# Altium PCB 温控PCB_0617F.PcbDoc
Units mm, origin at the board's own origin, x right, y up, seen from the top; angles counter-clockwise.
Board outline 143.5 x 82 mm, 2 copper layers (Top Layer, Bottom Layer); 94 components, 82 nets, 366 pads, 493 vias.
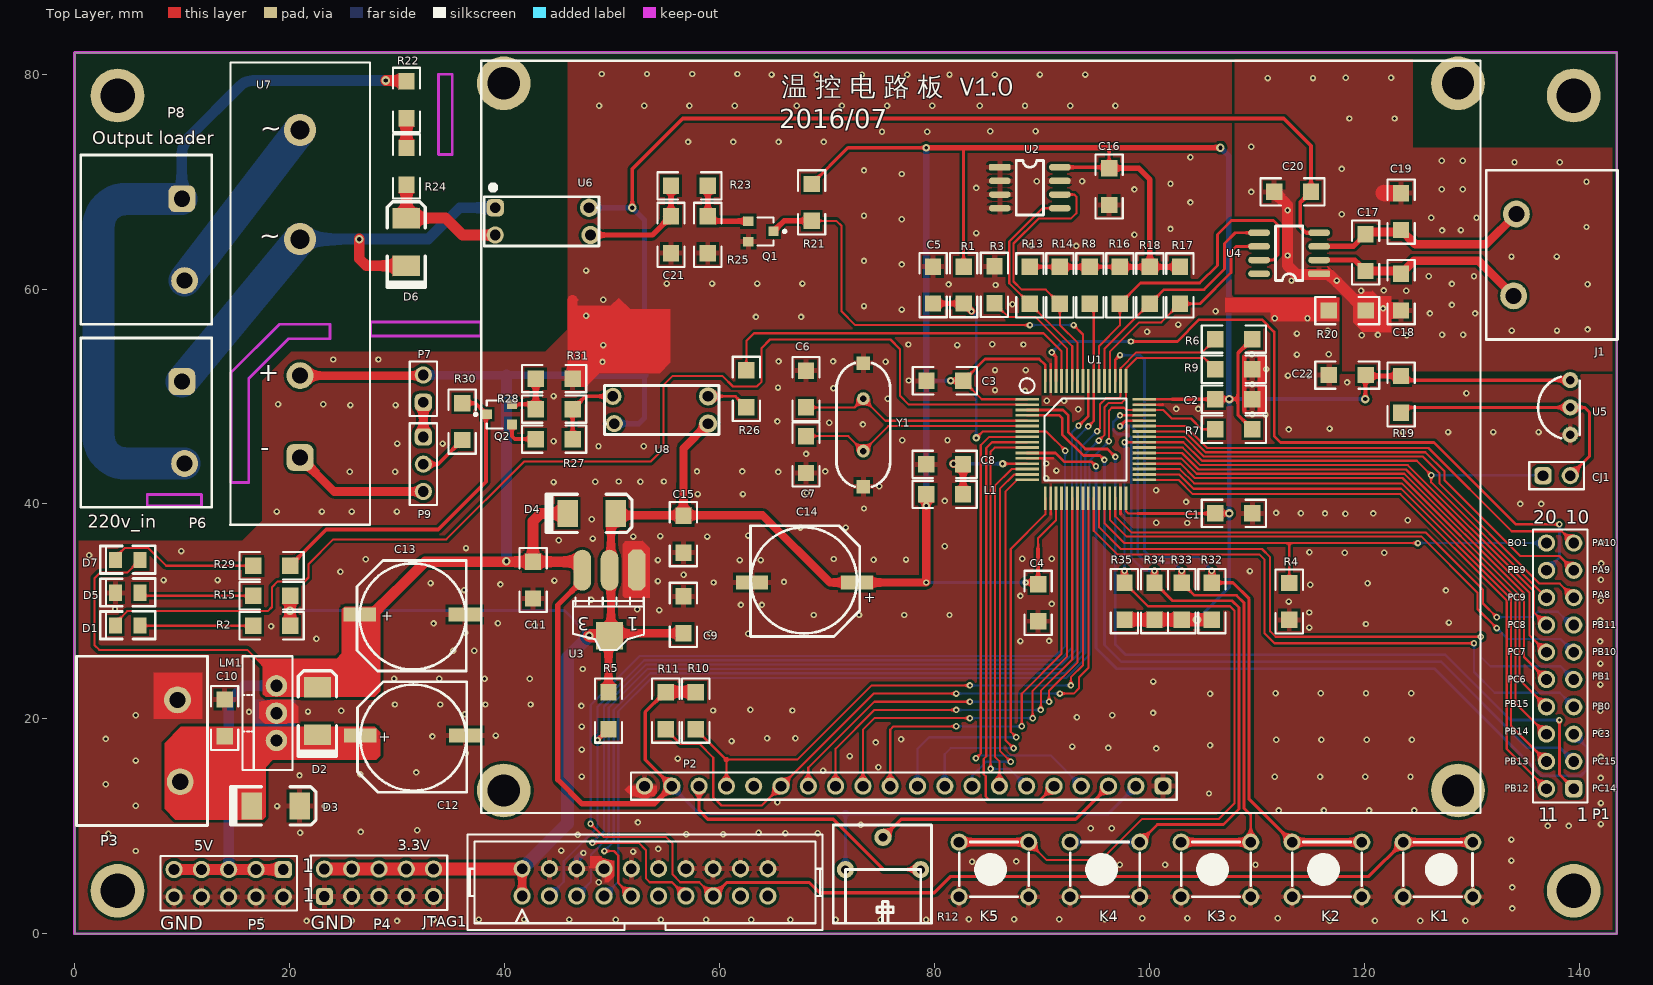
[diagram p0: Top Layer view]
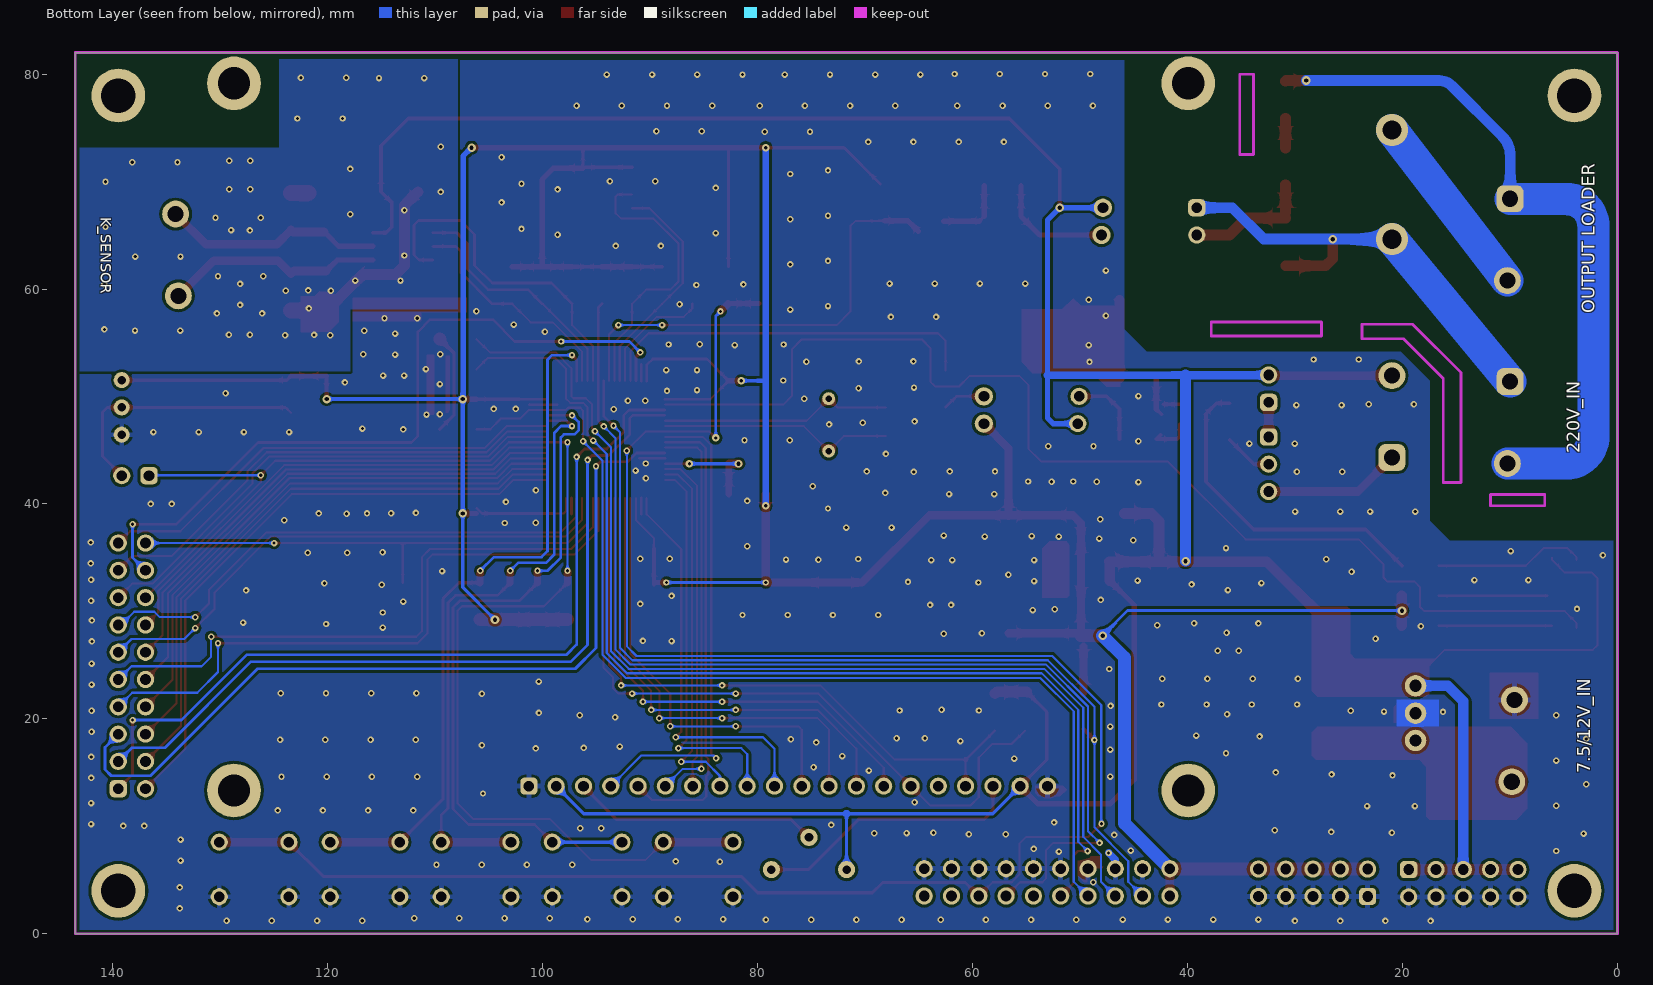
[diagram p1: Bottom Layer view, seen from below]

## Layer stack, top to bottom
Top Solder: solder mask 0.0102, Solder Resist, Dk 3.5
Top Layer: signal copper 0.0356
Dielectric1: dielectric 0.32, FR-4, Dk 4.8
Bottom Layer: signal copper 0.0356
Bottom Solder: solder mask 0.0102, Solder Resist, Dk 3.5

## Board outline
0,82 0,0 143.5,0 143.5,82

## Design rules (kind name [scope] priority, off if disabled: settings)
Clearance [All] p1: gap=0.2
ComponentClearance [All] p1: gap=0 collisioncheckmode=3 verticalgap=0 showdistances=FALSE
FabricationTestPointUsage TestPointUsage [All] p1: valid=0 allowmultiple=FALSE
FabricationTestpoint Testpoint [All] p1: side=3 testpointundercomponent=TRUE minsize=1.016 maxsize=2.54 preferedsize=1.524 minholesize=0 maxholesize=1.016 preferedholesize=0.813 testpointgrid=0.025 allowsidetop=TRUE allowsidebottom=TRUE usegrid=TRUE gridtolerance=0
PlaneConnect [All] p1: planeconnectstyle=Relief reliefexpansion=0.508 reliefentries=4 reliefconductorwidth=0.3 reliefairgap=0.254
PolygonConnect Via [All vs IsVia] p1: connectstyle=Direct reliefconductorwidth=0.254 reliefentries=2 polygonreliefangle="90 Angle" airgapwidth=0.254
PolygonConnect [All] p2: connectstyle=Relief reliefconductorwidth=0.508 reliefentries=4 polygonreliefangle="90 Angle" airgapwidth=0.254
RoutingVias [All] p1: holewidth=0.3 width=0.6 viastyle="Through Hole" minholewidth=0.254 minwidth=0.559 maxholewidth=0.711 maxwidth=1.27
SolderMaskExpansion [All] p1: expansion=0.102
Width [All] p1: maxlimit=3 minlimit=0.2 preferedwidth=0.2
26 further rules are at their usual default settings.

## Classes and differential pairs
component class MAX6675: C17 C18 C19 C20 CJ1 J1 R16 R17 R18 R19 R20 U4 U5
component class MCU: C1 C2 C3 C4 C5 C6 C7 C8 C9 D1 JTAG1 L1 P1 R1 R2 R3 R4 R5 R6 R7 R8 R9 U1 Y1
component class MCU电源: C10 C11 C12 C13 C14 C15 C16 D2 D3 D4 D5 LM1 P2 P3 P4 P5 R10 R11 R12 R13 R14 R15 U2 U3
component class 输出: C21 D6 D7 P6 P7 P8 P9 Q1 Q2 R21 R22 R23 R24 R25 R26 R27 R28 R29 R30 R31 R32 R33 R34 R35 U6 U7 U8

## Components (designator, comment, footprint, x,y, rotation, side; value= is the part's Value field where it differs from the comment)
C1 "104" 1206 106.162,39.116 r0 top
C2 "104" 1206 106.162,49.742 r0 top
C3 "104" 1206 82.702,51.46 r180 top
C4 "104" 1206 89.662,32.512 r270 top
C5 "104" 1206 79.883,58.649 r90 top
C6 "22p" 1206 68.062,48.98 r90 top
C7 "22p" 1206 68.062,42.884 r90 top
C8 "104" 1206 79.248,43.688 r0 top
C9 "104" 1206 56.657,27.965 r90 top
C10 "104" 1206 13.96,21.802 r270 top
C11 "104" 1206 42.662,31.2 r90 top
C12 "220UF" C220U 31.471,18.44 r180 top
C13 "470UF" C220U 31.42,29.718 r180 top
C14 "470UF" C220U 67.92,32.69 r0 top
C15 "104" 1206 56.657,35.467 r90 top
C16 "104" 1206 96.266,67.818 r90 top
C17 "104" 1206 120.132,61.68 r90 top
C18 "104" 1206 123.434,61.426 r270 top
C19 "104" 1206 123.434,65.49 r90 top
C20 "104" 1206 115.052,69.046 r180 top
C21 "104" 1206 55.499,66.76 r270 top
C22 "104" 1206 120.142,51.994 r180 top (schematic designator C3)
CJ1 "DS18B20" HDR1X2 136.642,42.63 r0 top
D1 "" LED 5.019,28.838 r0 top
D2 "1N4007" D7227 22.596,18.5 r90 top
D3 "1N4007" D7227 16.5,11.896 r0 top
D4 "1N4007" D7227 45.898,39.116 r0 top
D5 "" LED 5.019,31.886 r0 top
D6 "1N4007" D7227 30.861,62.154 r90 top
D7 "" LED 5.019,34.934 r0 top
J1 "K_SENSOR" OUT_CJ#1 137.15,62.442 r0 top
JTAG1 "JTAG" JTAG_20 53.076,4.784 r0 top
K1 "Comment" KEY_M 123.607,8.517 r0 top
K2 "Comment" KEY_M 119.799,3.452 r180 top
K3 "Comment" KEY_M 109.469,3.452 r180 top
K4 "Comment" KEY_M 99.139,3.452 r180 top
K5 "Comment" KEY_M 88.809,3.452 r180 top
L1 "10uH" 1206 79.248,40.894 r0 top
LM1 "7805" TO-220 18.786,20.532 r90 top
P1 "GPIO" HDR2X10_CEN 139.508,13.498 r90 top
P2 "12864" LED/12864M 37.836,81.238 r0 top locked
P3 "7.5v" OUT_CJ#2 6.594,17.23 r180 top
P4 "+3V3" HDR2X5 23.241,3.48 r0 top
P5 "+5V" HDR2X5 19.421,5.978 r180 top
P6 "220V IN" OUT_CJ#3 7,46.846 r180 top
P7 "OUT" HDR1X2 32.451,49.454 r90 top
P8 "OUT--LOADER" OUT_CJ#3 7,63.864 r180 top
P9 "SW" HDR1X3 32.451,46.237 r270 top
Q1 "9014" 9014 63.998,65.236 r180 top
Q2 "9014" 9014 39.395,48.463 r0 top
R1 "" 1206 82.728,62.078 r270 top
R2 "1K" 1206 20.056,28.66 r180 top
R3 "10K" 1206 85.598,58.674 r90 top
R4 "10K" 1206 113.03,29.21 r90 top
R5 "10K" 1206 49.682,22.479 r270 top
R6 "10K" 1206 106.162,55.34 r0 top
R7 "10K" 1206 106.162,46.948 r0 top
R8 "10K" 1206 94.478,58.632 r90 top
R9 "10K" 1206 109.591,52.536 r180 top
R10 "10K" 1206 57.8,22.479 r270 top
R11 "10K" 1206 55.006,22.479 r270 top
R12 "10K" VR 78.73,0.974 r180 top
R13 "10K" 1206 88.89,62.061 r270 top
R14 "10K" 1206 91.684,62.061 r270 top
R15 "1K" 1206 20.056,31.454 r180 top
R16 "10K" 1206 97.272,58.632 r90 top
R17 "10K" 1206 102.86,58.632 r90 top
R18 "10K" 1206 100.066,58.632 r90 top
R19 "10K" 1206 123.434,48.472 r90 top
R20 "0" 1206 120.142,57.997 r180 top
R21 "10K" 1206 68.58,66.345 r90 top
R22 "120K" 1206 30.886,79.324 r270 top
R23 "10K" 1206 58.928,69.596 r180 top
R24 "100K" 1206 30.886,69.698 r90 top
R25 "10K" 1206 58.918,63.331 r90 top
R26 "470" 1206 62.509,48.997 r90 top
R27 "4.7K" 1206 42.916,46.034 r0 top
R28 "10K" 1206 42.916,48.828 r0 top
R29 "1k" 1206 20.056,34.248 r180 top
R30 "10" 1206 36.068,49.378 r270 top
R31 "0" 1206 42.916,51.664 r0 top
R32 "10K" 1206 105.827,32.662 r270 top
R33 "10K" 1206 103.033,32.662 r270 top
R34 "10K" 1206 100.493,32.662 r270 top
R35 "10K" 1206 97.699,32.662 r270 top
U1 "STM32F103RBT6" LQFP64 88.636,49.742 r0 top
U2 "24C202" SO-8 86.096,71.332 r0 top
U3 "AMS1117-3.3" AMS1117 52.324,33.833 r180 top
U4 "MAX6675" SO-8 115.814,61.426 r180 top
U5 "DS18B20" DS18B20 139.182,46.44 r90 top
U6 "PC817" pc817#1 43.942,66.548 r90 top
U7 "SCR" SCR 20.98,59.563 r0 top
U8 "PC817" pc817#2 54.153,48.489 r270 top
Y1 "8MHz" XTAL_US 73.396,44.916 r90 top

## Footprints (in the part's own frame and the unit in brackets; to place one, negate y for a bottom-side part, rotate by r counter-clockwise, add the part's x,y. Pads: shape width x height; smd on the part's side, far side on the other; paste and mask are expansions set on the pad)
1206 [mil]
  rect 60x60 smd: 1(0,0) 2(135,0)
  silkscreen extent -50,-50 185,50
9014 [mm]
  rect 0.95x0.9 smd: B(1.302,-1.077) C(-1.048,-0.127) E(1.302,0.823)
  silkscreen extent -2.2,-1.43 0.43,1.17
AMS1117 [mil]
  oct 65x150 smd: 1(0.03,-0.06)
  oval 65x150 smd: 2(100.03,-0.06) 3(200.03,-0.06)
  rect 100x100 smd: 4(100.03,239.94)
  silkscreen extent -26,100 234,293
C220U [mm]
  rect 3x1.3 smd: 1(4.89,0) 2(-4.889,0)
  silkscreen extent -5.02,-5.02 5.14,5.27
D7227 [mm]
  rect 1.905x2.54 smd: 1(4.445,0) 2(0,0)
  silkscreen extent -2,-1.78 5.97,1.78
DS18B20 [mm]
  round 1.5 hole 0.8: 1(0,0) 2(2.54,0) 3(5.08,0)
  silkscreen extent -0.33,-0.88 5.41,3
HDR1X2 [mm]
  rrect50% 1.6x1.6 hole 1: 1(0,0)
  round 1.6 hole 1: 2(2.54,0)
  silkscreen extent -1.27,-1.27 3.81,1.27
HDR1X3 [mm] "Connector; Header; 3 Position"
  rrect50% 1.6x1.6 hole 1: 1(0,0)
  round 1.6 hole 1: 2(2.54,0) 3(5.08,0)
  silkscreen extent -1.27,-1.27 6.35,1.27
HDR2X5 [mm] "Connector; Header; 5x2 Position"
  rrect50% 1.6x1.6 hole 1: 1(0,0)
  round 1.6 hole 1: 2(0,2.54) 3(2.54,0) 4(2.54,2.54) 5(5.08,0) 6(5.08,2.54) 7(7.62,0) 8(7.62,2.54) 9(10.16,0) 10(10.16,2.54)
  silkscreen extent -1.27,-1.27 11.43,3.81
HDR2X10_CEN [mm] "Connector; Header; 10x2 Position"
  rrect50% 1.6x1.6 hole 1: 1(0,0)
  round 1.6 hole 1: 2(2.54,0) 3(5.08,0) 4(7.62,0) 5(10.16,0) 6(12.7,0) 7(15.24,0) 8(17.78,0) 9(20.32,0) 10(22.86,0) 11(0,2.54) 12(2.54,2.54) 13(5.08,2.54) 14(7.62,2.54) 15(10.16,2.54) 16(12.7,2.54) 17(15.24,2.54) 18(17.78,2.54) 19(20.32,2.54) 20(22.86,2.54)
  silkscreen extent -1.27,-1.27 24.13,3.81
JTAG_20 [mm]
  round 1.6 hole 1: 1(-11.43,-1.27) 2(-11.43,1.27) 3(-8.89,-1.27) 4(-8.89,1.27) 5(-6.35,-1.27) 6(-6.35,1.27) 7(-3.81,-1.27) 8(-3.81,1.27) 9(-1.27,-1.27) 10(-1.27,1.27) 11(1.27,-1.27) 12(1.27,1.27) 13(3.81,-1.27) 14(3.81,1.27) 15(6.35,-1.27) 16(6.35,1.27) 17(8.89,-1.27) 18(8.89,1.27) 19(11.43,-1.27) 20(11.43,1.27)
  silkscreen extent -16.51,-4.44 16.51,4.44
KEY_M [mm]
  round 1.6 hole 1: 1(0.022,0.007) 1(6.5,0.007) 2(0.022,-5.073) 2(6.5,-5.073)
  silkscreen extent 0.02,-5.08 6.48,0
LED [mm]
  rect 1.2x1.5 smd: A(1.057,-0.153) K(-1.229,-0.153)
  silkscreen extent -2.64,-1.42 2.48,1.17, body extent -1.12,-0.8 0.88,0.46, height 0.55
LED/12864M [mm] "Connector; Header; 20 Position"
  round 5 hole 3: 0(2.1,-67.9) 0(2.1,-2.1) 0(90.9,-67.9) 0(90.9,-2.1)
  rrect50% 1.6x1.6 hole 1: 1(63.46,-67.5)
  round 1.6 hole 1: 2(60.92,-67.5) 3(58.38,-67.5) 4(55.84,-67.5) 5(53.3,-67.5) 6(50.76,-67.5) 7(48.22,-67.5) 8(45.68,-67.5) 9(43.14,-67.5) 10(40.6,-67.5) 11(38.06,-67.5) 12(35.52,-67.5) 13(32.98,-67.5) 14(30.44,-67.5) 15(27.9,-67.5) 16(25.36,-67.5) 17(22.82,-67.5) 18(20.28,-67.5) 19(17.74,-67.5) 20(15.2,-67.5)
  silkscreen extent 0,-70 93,0
LQFP64 [mm] "LQFP64"
  rect 2.2x0.254 smd: 1(0,0) 2(0,-0.5) 3(0,-1) 4(0,-1.5) 5(0,-2) 6(0,-2.5) 7(0,-3) 8(0,-3.5) 9(0,-4) 10(0,-4.5) 11(0,-5) 12(0,-5.5) 13(0,-6) 14(0,-6.5) 15(0,-7) 16(0,-7.5) 33(10.9,-7.5) 34(10.9,-7) 35(10.9,-6.5) 36(10.9,-6) 37(10.9,-5.5) 38(10.9,-5) 39(10.9,-4.5) 40(10.9,-4) 41(10.9,-3.5) 42(10.9,-3) 43(10.9,-2.5) 44(10.9,-2) 45(10.9,-1.5) 46(10.9,-1) 47(10.9,-0.5) 48(10.9,0)
  rect 0.254x2.2 smd: 17(1.7,-9.2) 18(2.2,-9.2) 19(2.7,-9.2) 20(3.2,-9.2) 21(3.7,-9.2) 22(4.2,-9.2) 23(4.7,-9.2) 24(5.2,-9.2) 25(5.7,-9.2) 26(6.2,-9.2) 27(6.7,-9.2) 28(7.2,-9.2) 29(7.7,-9.2) 30(8.2,-9.2) 31(8.7,-9.2) 32(9.2,-9.2) 49(9.2,1.7) 50(8.7,1.7) 51(8.2,1.7) 52(7.7,1.7) 53(7.2,1.7) 54(6.7,1.7) 55(6.2,1.7) 56(5.7,1.7) 57(5.2,1.7) 58(4.7,1.7) 59(4.2,1.7) 60(3.7,1.7) 61(3.2,1.7) 62(2.7,1.7) 63(2.2,1.7) 64(1.7,1.7)
  silkscreen extent -0.68,-7.56 9.26,1.95
OUT_CJ#1 [mm]
  round 2.5 hole 1.5: 1(-2.98,4.536) 2(-3.234,-3.084)
  silkscreen extent -5.77,-7.15 6.42,8.6
OUT_CJ#2 [mm]
  round 2.5 hole 1.5: 1(-2.98,-4.536) 2(-3.234,3.084)
  silkscreen extent -5.77,-8.6 6.42,7.15
OUT_CJ#3 [mm]
  rrect50% 2.5x2.5 hole 1.5: 1(-2.98,-4.536)
  round 2.5 hole 1.5: 2(-3.234,3.084)
  silkscreen extent -5.77,-8.6 6.42,7.15
pc817#1 [mm]
  rrect50% 1.6x1.6 hole 1: 1(1.016,4.801)
  round 1.6 hole 1: 2(-1.524,4.801)
  round 1.7 hole 1: 3(1.016,-3.937) 4(-1.524,-4.064)
  silkscreen extent -2.54,-4.85 2.03,5.82
pc817#2 [mm]
  round 1.7 hole 1: 1(1.016,4.801) 2(-1.524,4.801)
  round 1.6 hole 1: 3(1.016,-3.937) 4(-1.524,-4.064)
  silkscreen extent -2.54,-4.85 2.03,5.82
SCR [mm]
  rrect50% 2.5x2.5 hole 1.5 paste+0: 1(0,-15.24)
  round 2.5 hole 1.5: 2(0,-7.62)
  round 3 hole 1.8: 3(0,5.08) 4(0,15.24)
  silkscreen extent -6.5,-21.5 6.5,21.5
SO-8 [mil]
  rrect50% 80x24 smd: 1(0,0)
  oval 80x24 smd: 2(0,-50) 3(0,-100) 4(0,-150) 5(220,-150) 6(220,-100) 7(220,-50) 8(220,0)
  silkscreen extent 60,-175 160,25
TO-220 [mm]
  round 2 hole 1.143: 1(-2.54,0) 2(0,0) 3(2.54,0)
  silkscreen extent -5.29,-1.48 5.29,3.18
VR [mm]
  round 1.6 hole 0.8: 1(0,-5) 2(7,-5) 3(3.5,-8)
  silkscreen extent -1.02,-9.14 8.13,0
XTAL_US [mm]
  round 1.2 hole 0.6: 1(0,0) 2(4.88,0)
  rect 1.27x1.27 smd: ""(-3.31,0) ""(8.19,0)
  silkscreen extent -3.33,-2.5 8.21,2.5

## Part data
C1 C2 C3 C4 C5 C6 C7 C8 C9 C21 C22: library part C
C10 C11 C15 C17 C18 C19 C20: library part 普通电容, "Capacitor"
C12 C13 C14: library part ECAP
C16: library part CAP, "Capacitor"
CJ1 P3 P6 P7 P8: library part "Header 2", "Header, 2-Pin"
D1 D5 D7: library part 发光二极管
D2 D3 D4 D6: library part DIODE, "Diode"
J1: library part CON2, "Connector"
L1: library part Inductor, "Inductor"
LM1: library part LM7805CT
P1: library part "Header 10X2A", "Header, 10-Pin, Dual row"
P2: library part "Header 20", "Header, 20-Pin"
P4 P5: library part "Header 5X2", "Header, 5-Pin, Dual row"
P9: library part "Header 3", "Header, 3-Pin"
R1 R2 R3 R4 R5 R6 R7 R8 R9 R10 R11 R15 R20 R21 R22 R23 R24 R25 R26 R27 R28 R29 R30 R31 R32 R33 R34 R35: library part Res2, "Resistor"
R12: library part RESVR, "Potentiometer"
R13 R14 R16 R17 R18 R19: library part RES2
U1: library part STM32F103RDT6
U2: library part 24CXX
U3: library part AMS1117
U6 U8: library part OPTOTRIAC
Y1: library part XTAL, "Crystal Oscillator"

## Free pads (board coordinates)
  round 5 hole 3.2: 0(4,4) 0(4,78) 0(139.5,4) 0(139.5,78)

## Via types
v1: diameter 0.6, hole 0.3, Top Layer to Bottom Layer, tented both sides, 475 vias
v2: diameter 0.8, hole 0.4, Top Layer to Bottom Layer, tented both sides, 11 vias
v3: diameter 0.7, hole 0.3, Top Layer to Bottom Layer, tented both sides, 5 vias
v4: diameter 0.6/0.6 (per signal layer), hole 0.3, Top Layer to Bottom Layer, tented both sides, 1 vias
v5: diameter 0.7, hole 0.4, Top Layer to Bottom Layer, tented both sides, 1 vias

## Nets (pads, with @x,y where several pads share a name; then routed paths per layer and width w, separated by ;. In a path a pad name is that pad's centre, name@x,y a point inside that pad or via, vN(x,y) a via of type N, cw(c..) or ccw(c..) an arc to the next point about the centre after c; other vN are vias at no path point)
3V3: C1.1 C2.1 C3.1 C4.1 C9.1 C14.1 C15.2 C16.2 C22.1 D4.1 JTAG1.1 JTAG1.2 L1.1 P4.2 P4.4 P4.6 P4.8 P4.10 R1.1 R2.1 R5.1 R6.2 R7.2 R8.2 R13.1 R14.1 R15.1 R16.2 R17.2 R18.2 R19.2 R21.2 R32.2 R33.2 R34.2 R35.2 U1.1 U1.19 U1.32 U1.48 U1.64 U2.8 U3.2 U3.4 U5.3 U8.1 | length 432.7
  Top Layer w0.2: R13.1 R14.1 ; 89.662,35.814 89.662,36.83 91.336,38.504 U1.19 ; R8.2 R16.2 ; U1.32 97.836,39.324 98.044,39.116 99.314,39.116 ; U1.48 102.15,49.742 ; C1.1@105.664,39.116 C1.1@106.172,39.624 ; R19.2 R19.2@123.815,51.52
  Top Layer w0.23: C3.1 84.421,49.742 U1.1
  Top Layer w0.25: C3.1 84.734,53.492 89.764,53.492 90.336,52.92 U1.64
  Top Layer w0.254: 82.702,73.152 82.728,73.127 R1.1 ; C16.2 96.266,73.152
  Top Layer w0.3: R21.2 71.958,73.152 v3(79.248,73.152) ; C4.1@89.484,32.69 C4.1 ; 99.314,39.116 C1.1@105.664,39.116 ; 102.15,49.742 C2.1 C2.1@106.179,49.759 ; v2(107.442,49.759) 108.255,49.759 ; R6.2@109.569,55.34 108.255,54.026 108.255,48.284 R7.2
  Top Layer w0.35: R13.1 R16.2 ; C4.1 89.662,35.814 ; U2.8 C16.2@96.181,71.332 ; v2(120.117,49.759) 120.117,51.876 C22.1@120.142,51.901 ; R19.2@123.815,51.52 U5.3
  Top Layer w0.5: v3(79.248,73.152) 82.702,73.152 96.266,73.152 v2(106.629,73.152) ; v3(81.534,51.46) C3.1 ; v1(88.494,32.69) C4.1@89.484,32.69 ; R14.1 R8.2 ; C16.2 99.009,71.247 100.066,70.19 R18.2 ; R16.2 R18.2 ; R17.2 R18.2 ; C1.1@106.172,39.116 v2(107.442,39.116) ; C2.1@106.179,49.759 v2(107.442,49.759) ; C22.1@120.142,51.901 R19.2
  Top Layer w0.762: JTAG1.1 JTAG1.2 ; U3.4@49.304,27.738 49.077,27.965 U3.4@49.911,27.965 ; R5.1 U3.4@49.682,26.72 ; C9.1 U3.4@49.911,27.965 ; U8.1 56.657,45.177 C15.2@56.657,38.947 ; L1.1 v1(79.248,32.69) C14.1 70.282,32.69 64.025,38.947 C15.2@56.657,38.947 ; U3.4@49.911,27.965 49.911,38.195 50.663,38.947 56.607,38.947 C15.2 C15.2@56.657,38.947
  Top Layer w1: R2.1 R15.1
  Top Layer w1.2: P4.2 P4.4 P4.6 P4.8 P4.10 41.612,6.02 JTAG1.2 ; v2(47.904,27.738) 49.304,27.738 U3.4 U3.4@49.911,27.738 ; R35.2 R34.2 R33.2 v2(104.445,29.233) R32.2 ; R6.2@109.569,55.34 R6.2
  Bottom Layer w0.254: v2(20.041,30.074) 45.569,30.074 v2(47.904,27.738)
  Bottom Layer w0.3: v1(79.248,32.69) v1(88.494,32.69) ; v2(104.445,29.233) 107.442,32.23 v2(107.442,39.116)
  Bottom Layer w0.35: 79.248,51.46 v3(81.534,51.46) ; v2@107.417,49.759 v2(107.442,49.759) v2(120.117,49.759)
  Bottom Layer w0.4: v2(107.442,39.116) v2(107.442,49.759)
  Bottom Layer w0.5: v2(106.629,73.152) 107.417,72.365 v2@107.417,49.759
  Bottom Layer w0.6: v3(79.248,39.827) 79.248,51.46 v3(79.248,73.152)
  Bottom Layer w1.2: JTAG1.2 45.872,10.28 45.872,25.706 v2(47.904,27.738)
220V-1: D6.2 P6.1 U6.1 U7.3 | length 43.1
  Top Layer w1: v2(26.492,64.643) 26.492,62.814 27.153,62.154 D6.2
  Bottom Layer w1: U7.3 v2(26.492,64.643) 32.918,64.643 35.839,67.564 U6.1
  Bottom Layer w3: P6.1 U7.3
220V-2: P6.2 P8.1 R22.1 | length 66.5
  Top Layer w1: v2(28.956,79.4) 30.81,79.4 R22.1
  Bottom Layer w1: P8.1@9.957,68.377 ccw(c9.957,68.401) P8.1 9.98,72.428 cw(c12.52,72.428) 10.724,74.224 15.39,78.89 cw(c16.622,77.658) 16.622,79.4 v2(28.956,79.4)
  Bottom Layer w3: P8.1@9.957,68.377 4.775,68.377 ccw(c4.775,65.837) 2.235,65.837 2.235,46.303 ccw(c4.775,46.303) 4.775,43.763 P6.2
+5V: C11.2 C13.1 C20.1 D2.1 D4.2 D7.A LM1.3 P2.2 P2.19 P5.1 P5.3 P5.5 P5.7 P5.9 P7.2 R10.1 R11.1 R12.2 U3.3 U4.4 U6.3 U7.2 U8.3 | length 346.4
  Top Layer w0.2: D7.A@6.077,35.021 D7.A 4.9,33.604 2.362,33.604 1.854,33.096 1.854,26.848 2.286,26.416 16.078,26.416 18.786,23.708 LM1.3
  Top Layer w0.25: U7.2@20.564,51.393 U7.2@20.606,51.435
  Top Layer w0.3: R11.1@54.991,22.53 53.111,20.65 53.111,16.203 P2.19
  Top Layer w0.35: v2(51.892,67.564) 51.892,71.171 56.591,75.87 112.522,75.87 115.052,73.34 C20.1 114.046,68.04 114.046,65.786 114.596,65.236 U4.4
  Top Layer w0.5: P7.2@32.4,51.943 P7.2 ; U3.3@47.243,32.867 44.958,30.582 44.958,14.351 47.219,12.09 53.928,12.09 P2.19
  Top Layer w0.762: C13.1@26.596,29.422 C13.1@27.422,29.422
  Top Layer w0.8: U7.2 P7.2@32.4,51.943
  Top Layer w1: P5.9 P5.7 P5.5 P5.3 P5.1 ; C13.1@27.422,29.422 32.629,34.629 C11.2 ; D4.2 43.383,39.116 42.662,38.395 C11.2 ; U3.3@47.243,32.867 U3.3 U3.3@47.243,34.629 ; U3.3@47.269,34.629 U3.3@47.243,34.629 ; R11.1@54.991,22.53 57.734,22.53 R10.1@57.912,22.352 ; C11.2 U3.3@47.243,34.629
  Bottom Layer w0.3: v2@51.653,67.564 cw(c51.892,67.564) 52.132,67.564 cw(c51.892,67.564) v2@52.062,67.395 ; P2.19 58.138,11.176 71.73,11.176 ; R12.2 71.73,11.176 ; P2.2 96.194,11.176 71.73,11.176
  Bottom Layer w0.5: U6.3 v2@51.653,67.564 ; U8.3 52.502,47.473 53.035,48.006 53.035,51.994 53.035,66.421 52.062,67.395 v2(51.892,67.564) ; 71.83,11.176 ccw(c71.73,11.176) 71.83,11.176
  Bottom Layer w0.7: 40.183,51.994 53.035,51.994
  Bottom Layer w0.8: P7.2 40.183,51.994
  Bottom Layer w1: P5.5 14.341,21.631 15.782,23.072 LM1.3 ; v2(40.183,34.671) 40.183,51.994
+9V: C10.2 C12.1 D2.2 D3.2 LM1.1 P3.2 | length 21.4
  Top Layer w0.762: P3.2 16.5,14.146 ; D3.2 16.5,14.146 ; 26.596,16.722 16.754,16.722 16.5,16.468 16.5,14.146
BOOT0: R3.1 U1.60 | length 11.3
  Top Layer w0.2: R3.1@86.096,58.632 86.096,58.176 86.868,57.404 89.408,57.404 92.336,54.476 U1.60
BOOT1: P1.20 R4.2 U1.28 | length 47.9
  Top Layer w0.2: U1.28 95.836,38.213 97.69,36.358 113.03,36.358 ; R4.2 113.03,36.358 ; v1(125.004,36.358) 113.03,36.358
  Bottom Layer w0.2: v1(125.004,36.358) P1.20
GND: C1.2 C2.2 C3.2 C4.2 C5.2 C6.2 C7.1 C8.1 C9.2 C10.1 C11.1 C12.2 C13.2 C14.2 C15.1 C16.1 C21.2 C22.2 D3.1 D5.K JTAG1.4 JTAG1.6 JTAG1.8 JTAG1.10 JTAG1.12 JTAG1.14 JTAG1.16 JTAG1.18 JTAG1.20 K1.2 K2.1 K3.1 K4.1 K5.1 LM1.2 P2.1 P2.20 P3.1 P4.1 P4.3 P4.5 P4.7 P4.9 P5.2 P5.4 P5.6 P5.8 P5.10 Q1.E R3.2 R4.1 R9.1 R20.2 R25.1 R31.2 U1.12 U1.18 U1.31 U1.47 U1.63 U2.1 U2.2 U2.3 U2.4 U2.7 U3.1 U5.1 Y1. | length 19
  Top Layer w0.254: 46.345,59.004 46.761,59.004 ; U1.12 91.008,44.242 ; 90.836,39.028 U1.18 ; U1.63 90.836,52.975 ; 97.336,39.064 U1.31 ; U1.47@98.654,49.242 U1.47 101.244,49.242 101.244,49.251
  Top Layer w0.91: R31.2 46.345,59.004
  Bottom Layer w0.7: JTAG1.6 46.726,6.899 v1(47.346,7.518)
  other v1: 17.382,1.194 21.59,1.194 25.798,1.194 30.006,1.194 116.798,1.219 121.006,1.219 125.214,1.219 129.421,1.219 50.351,1.295 54.559,1.295 58.767,1.295 62.975,1.295 66.607,1.295 70.815,1.295 75.023,1.295 79.231,1.295 33.409,1.321 37.617,1.321 41.825,1.321 46.033,1.321 83.219,1.346 87.427,1.346 91.635,1.346 95.843,1.346 99.348,1.448 103.556,1.448 107.764,1.448 111.972,1.448 133.782,2.362 133.782,4.318 48.768,4.801 97.265,6.426 101.473,6.426 105.681,6.426 109.889,6.426 83.515,6.706 87.63,6.731 133.706,6.807 51.968,7.645 5.69,7.705 45.288,7.747 54.305,7.899 133.706,8.763 46.812,9.195 56.921,9.271 60.35,9.271 3.15,9.322 69.164,9.347 66.142,9.373 20.98,9.398 63.652,9.398 26.619,9.474 31.877,9.627 94.564,9.83 96.52,9.83 137.084,10.033 139.04,10.033 73.152,10.135 142.037,10.211 52.426,10.363 112.048,11.481 116.256,11.481 120.464,11.481 124.672,11.481 18.847,11.887 23.292,11.887 5.69,11.913 142.037,12.167 65.405,12.243 105.562,13.056 2.896,13.919 142.011,14.503 111.692,14.605 115.9,14.605 120.108,14.605 124.316,14.605 47.193,14.63 20.93,14.732 26.594,14.834 31.801,15.011 69.647,15.189 74.803,15.494 5.69,16.121 56.134,16.307 142.011,16.459 72.136,16.535 36.424,16.789 47.193,17.145 100.66,17.247 96.19,17.297 92.837,17.424 105.664,17.551 74.549,17.805 61.138,17.932 111.819,18.059 116.027,18.059 120.235,18.059 124.443,18.059 76.911,18.11 2.896,18.136 64.44,18.186 67.081,18.186 33.299,18.364 39.192,18.44 141.986,18.796 47.193,19.279 93.269,20.142 5.69,20.328 96.571,20.345 36.322,20.422 100.355,20.549 16.231,20.65 21.717,20.676 24.816,20.752 141.986,20.752 59.411,20.777 66.802,20.777 62.89,20.853 47.168,21.209 29.811,21.336 34.019,21.336 38.227,21.336 42.435,21.336 105.664,22.327 111.76,22.377 115.968,22.377 120.176,22.377 124.384,22.377 141.986,23.19 100.381,23.47 29.735,23.724 33.943,23.724 38.151,23.724 42.359,23.724 47.295,24.638 141.986,25.146 35.23,26.34 37.186,26.34 141.961,27.203 88.011,27.237 90.678,27.254 22.504,27.457 62.687,27.915 59.131,27.965 36.373,28.016 114.884,28.499 18.288,28.626 42.824,28.702 120.167,28.829 33.401,28.88 39.395,28.905 127.889,28.956 141.961,29.159 68.792,29.667 73,29.667 77.208,29.667 81.415,29.667 114.884,29.896 54.407,30.124 52.349,30.201 3.759,30.226 62.001,30.607 63.957,30.607 90.932,30.692 112.979,30.912 142.037,30.988 48.082,31.064 88.011,31.445 127.61,31.953 36.246,31.979 114.986,32.487 39.624,32.512 120.32,32.614 33.122,32.639 59.461,32.69 66.015,32.741 54.28,32.817 44.653,32.868 8.28,32.918 13.31,32.918 142.037,32.944 56.667,33.401 24.74,33.68 109.372,33.757 142.062,34.468 54.28,34.773 61.9,34.773 63.856,34.773 74.346,34.798 77.368,34.823 27.102,34.849 70.637,34.874 88.189,34.9 90.932,34.9 1.346,35.23 118.186,35.458 121.869,35.458 114.91,35.509 9.931,35.611 36.424,35.89 80.975,36.068 142.062,36.424 45.06,36.627 48.209,36.779 51.994,36.957 58.877,36.957 54.508,37.008 62.687,37.059 67.547,37.795 71.755,37.795 103.53,38.227 100.66,38.252 124.054,38.481 48.133,38.566 118.262,39.091 116.357,39.116 120.853,39.116 114.122,39.141 111.811,39.167 18.804,39.294 23.012,39.294 25.789,39.294 29.997,39.294 73.457,39.573 134.518,40.005 136.474,40.005 103.429,40.183 80.975,40.276 57.988,40.919 62.196,40.919 68.123,41.021 100.635,41.275 74.879,41.656 44.577,42.037 48.446,42.062 52.654,42.062 50.631,42.088 54.839,42.088 90.399,42.393 65.481,42.977 25.612,43.002 29.82,43.002 57.92,43.028 62.128,43.028 69.85,43.028 91.364,43.104 90.424,43.764 68.072,44.653 48.751,45.364 52.959,45.364 30.031,45.618 34.239,45.618 44.577,45.83 77.021,45.923 81.229,45.923 123.605,46.685 127.813,46.685 132.021,46.685 136.229,46.685 112.979,46.939 116.789,47.015 73.355,47.396 70.231,47.549 65.405,47.676 110.82,48.311 109.576,48.336 93.396,48.819 102.514,48.844 104.572,48.844 25.662,49.2 29.87,49.2 18.931,49.276 23.139,49.276 90.475,49.606 92.075,49.606 75.667,49.784 44.577,50.038 129.515,50.292 88.443,50.521 85.649,50.597 70.612,50.775 65.456,50.825 109.576,51.156 118.415,51.308 77.622,51.486 112.903,51.943 114.859,51.943 85.649,52.451 88.519,52.451 110.871,52.553 49.124,53.213 75.463,53.238 65.507,53.264 70.587,53.264 24.062,53.442 28.27,53.442 113.741,53.899 109.55,53.924 116.713,53.924 49.2,54.788 82.144,54.788 77.597,54.839 88.29,54.839 85.395,54.864 113.741,55.855 99.797,56.032 116.611,56.109 102.692,56.693 111.684,57.277 114.732,57.277 63.398,57.404 67.606,57.404 47.6,57.506 76.962,58.081 73.457,58.412 87.274,58.572 49.2,58.996 85.7,60.376 81.331,60.427 55.11,60.503 59.317,60.503 63.525,60.503 67.733,60.503 47.6,61.714 76.962,62.289 73.457,62.619 89.01,64.008 93.218,64.008 98.628,65.058 83.896,65.202 101.981,65.591 76.962,66.497 73.457,66.827 103.835,68.055 98.628,69.266 83.896,69.41 101.981,69.799 89.543,70.028 93.751,70.028 76.962,70.705 73.457,71.035 103.835,72.263 57.091,73.685 61.299,73.685 65.507,73.685 69.715,73.685 75.133,74.625 79.341,74.625 85.217,74.676 89.425,74.676 48.802,77.064 53.01,77.064 57.218,77.064 61.426,77.064 67.191,77.064 71.399,77.064 75.607,77.064 79.815,77.064 84.235,77.064 88.443,77.064 92.651,77.064 96.859,77.064 64.855,79.959 69.063,79.959 73.271,79.959 77.478,79.959 81.415,79.959 85.623,79.959 89.831,79.959 94.039,79.959 49.056,80.01 53.264,80.01 57.472,80.01 61.68,80.01
  other v4: 106.172,57.937
GND_6675: C18.2 C19.2 C20.2 R20.1 U4.1 | length 21.3
  Top Layer w1.016: C20.2 112.878,67.791 112.878,62.179 113.69,61.366 116.773,61.366 R20.1
  Top Layer w1.5: R20.1 C18.2 ; 121.793,68.936 123.417,68.936 C19.2
  other v1: 119.769,55.702 123.977,55.702 121.285,55.728 127.254,55.753 129.21,55.753 133.739,56.134 137.947,56.134 140.792,56.244 126.119,57.734 130.327,57.734 121.768,58.191 128.168,58.522 119.719,59.842 123.927,59.842 121.818,59.868 140.792,60.452 128.168,60.477 113.242,60.782 117.45,60.782 126.018,61.189 130.226,61.189 133.714,63.017 137.922,63.017 112.878,63.119 127.254,65.456 129.007,65.481 140.691,65.769 126.246,66.624 130.454,66.624 117.907,66.963 112.878,67.327 109.499,69.037 127.229,69.291 129.184,69.291 140.691,69.977 117.907,71.171 133.993,71.806 138.201,71.806 127.229,71.933 129.184,71.933 109.499,73.245 118.626,75.87 122.834,75.87 111.032,79.629 115.24,79.629 118.296,79.654 122.504,79.654
IIC_SCL: R14.2 U1.58 U2.6 | length 26.7
  Top Layer w0.2: U2.6 93.006,68.792 93.218,68.58 93.218,67.056 92.71,66.548 89.693,66.548 87.376,64.231 87.376,60.706 88.138,59.944 90.372,59.944 R14.2 91.684,56.652 93.336,55 U1.58
IIC_SDA: R13.2 U1.59 U2.5 | length 21.4
  Top Layer w0.2: U2.5 90.07,67.522 86.976,64.428 86.976,60.54 88.884,58.632 R13.2 92.836,54.686 U1.59
K1: K2.2 R32.1 U1.51 | length 65.9
  Top Layer w0.25: U1.51 96.836,53.402 v1(97.282,53.848)
  Top Layer w0.3: R32.1 107.8,32.662 109.296,31.166 109.296,12.528 K2.2@113.299,8.525
  Top Layer w0.65: R32.1 v1(105.827,33.782)
  Top Layer w0.8: K2.2@113.299,8.525 K2.2@119.777,8.525
  Bottom Layer w0.25: v1(97.282,53.848) 99.136,53.848 99.568,53.416 99.568,35.611 100.127,35.052 104.557,35.052 v1(105.827,33.782)
K2: K3.2 R33.1 U1.44 | length 57.1
  Top Layer w0.25: v1(97.282,47.244) 97.78,47.742 U1.44
  Top Layer w0.254: R33.1 104.199,31.496 108.128,31.496 108.819,30.805 108.819,11.678 109.447,11.051 K3.2@109.447,8.525
  Top Layer w0.65: R33.1 v1(103.033,33.782)
  Top Layer w0.8: K3.2@102.969,8.525 K3.2@109.447,8.525
  Bottom Layer w0.25: v1(97.282,47.244) 98.298,47.244 98.933,46.609 98.933,35.306 99.72,34.519 102.296,34.519 v1(103.033,33.782)
K3: K4.2 R34.1 U1.45 | length 65.4
  Top Layer w0.25: v1(97.282,48.242) U1.45
  Top Layer w0.254: K4.2@99.117,8.525 100.752,10.16 106.909,10.16 108.365,11.617 108.365,30.344 107.721,30.988 102.167,30.988 R34.1
  Top Layer w0.65: R34.1 v1(100.493,33.782)
  Bottom Layer w0.25: v1(97.282,48.242) 96.657,47.617 96.657,46.853 97.028,46.482 98.044,46.482 98.324,46.202 98.324,35.001 99.543,33.782 v1(100.493,33.782)
  Bottom Layer w0.3: K4.2@92.639,8.525 K4.2@99.117,8.525
LCD_CLK: P2.6 U1.10 | length 37.1
  Top Layer w0.2: v1(85.236,15.348) 85.236,44.85 85.628,45.242 U1.10
  Bottom Layer w0.2: v1(85.236,15.348) 86.986,15.348 P2.6
LCD_D0: P2.7 U1.14 | length 31.8
  Top Layer w0.2: P2.7 86.056,16.052 85.636,16.472 85.636,41.694 87.184,43.242 U1.14
LCD_D1: P2.8 U1.15 | length 34
  Top Layer w0.2: v1(87.122,16.002) 86.106,17.018 86.106,41.402 87.446,42.742 U1.15
  Bottom Layer w0.2: P2.8 83.516,14.682 84.836,16.002 v1(87.122,16.002)
LCD_D2: P2.9 U1.16 | length 36.3
  Top Layer w0.2: v1(87.376,17.272) 86.614,18.034 86.614,41.148 87.708,42.242 U1.16
  Bottom Layer w0.2: P2.9 80.976,16.714 81.534,17.272 v1(87.376,17.272)
LCD_D3: P2.10 U1.17 | length 36.9
  Top Layer w0.2: v1(87.63,18.288) 87.122,18.796 87.122,35.814 90.336,39.028 U1.17
  Bottom Layer w0.2: P2.10 78.436,17.222 79.502,18.288 v1(87.63,18.288)
LCD_D4: P2.11 U1.20 | length 40.4
  Top Layer w0.2: P2.11 75.896,19 76.2,19.304 v1(82.042,19.304) ; v1(88.138,19.304) 88.138,22.352 91.836,26.05 U1.20
  Bottom Layer w0.2: v1(82.042,19.304) v1(88.138,19.304)
LCD_D5: P2.12 U1.21 | length 43.3
  Top Layer w0.2: P2.12 73.356,19 74.422,20.066 v1(83.312,20.066) ; v1(89.154,20.066) 89.154,22.606 92.336,25.788 U1.21
  Bottom Layer w0.2: v1(83.312,20.066) v1(89.154,20.066)
LCD_D6: P2.13 U1.22 | length 45
  Top Layer w0.2: P2.13 70.816,17.222 74.422,20.828 v1(82.042,20.828) ; v1(89.916,20.828) 89.916,22.606 92.836,25.526 U1.22
  Bottom Layer w0.2: v1(82.042,20.828) v1(89.916,20.828)
LCD_D7: P2.14 U1.23 | length 46.7
  Top Layer w0.2: P2.14 68.276,15.444 74.422,21.59 v1(83.312,21.59) ; v1(90.678,21.59) 90.678,22.606 93.336,25.264 U1.23
  Bottom Layer w0.2: v1(83.312,21.59) v1(90.678,21.59)
LCD_PS: P2.15 R11.2 U1.25 | length 66
  Top Layer w0.2: R11.2@55.118,18.923 56.388,17.653 58.166,17.653 59.436,16.383 59.436,12.7 60.198,11.938 63.936,11.938 P2.15 74.35,22.352 v1(82.042,22.352) ; v1(91.694,22.352) 92.964,22.352 93.472,22.86 93.472,23.876 94.336,24.74 U1.25
  Bottom Layer w0.2: v1(82.042,22.352) v1(91.694,22.352)
LCD_RS: P2.4 U1.8 | length 45.1
  Top Layer w0.2: v1(83.871,16.332) 83.896,16.332 84.328,16.764 84.328,45.466 85.104,46.242 U1.8
  Bottom Layer w0.2: v1(83.871,16.332) 83.896,16.332 84.166,16.602 90.812,16.602 P2.4
LCD_RST: P2.17 R10.2 U1.24 | length 62.2
  Top Layer w0.2: R10.2@57.912,18.923 60.656,16.179 P2.17 60.656,16.206 67.26,16.206 74.168,23.114 v1(83.312,23.114) ; v1(92.71,23.114) 92.71,23.876 93.836,25.002 U1.24
  Top Layer w0.3: 60.756,16.206 ccw(c60.656,16.206) 60.756,16.206
  Bottom Layer w0.2: v1(83.312,23.114) v1(92.71,23.114)
LCD_SID: P2.5 U1.9 | length 43.6
  Top Layer w0.2: U1.9 85.366,45.742 84.836,45.212 84.836,16.51 84.606,16.28 84.606,14.835 84.785,14.656 84.785,12.776 85.115,12.446 89.844,12.446 P2.5
MAX6675_CS: R17.1 U1.52 U4.6 | length 21.8
  Top Layer w0.2: U1.52 96.336,54.172 99.06,56.896 101.124,56.896 R17.1
  Top Layer w0.254: R17.1 104.733,58.632 107.62,61.519 107.62,63.5 108.086,63.966 U4.6
MAX6675_SCK: R16.1 U1.54 U4.7 | length 32.5
  Top Layer w0.2: U1.54 95.336,54.696 97.272,56.632 R16.1
  Top Layer w0.254: R16.1 99.194,60.554 104.699,60.554 106.35,62.205 106.35,65.075 107.645,66.37 111.576,66.37 111.983,65.964 111.983,63.166 111.513,62.696 U4.7
MAX6675_SO: R18.1 U1.53 U4.5 | length 23.2
  Top Layer w0.2: U1.53 95.836,54.434 R18.1@100.034,58.632
  Top Layer w0.254: R18.1@100.034,58.632 R18.1 101.378,59.944 105.096,59.944 107.01,61.859 107.01,64.237 108.01,65.236 U4.5
NetC8_2: C8.2 L1.2 U1.13 | length 10.6
  Top Layer w0.2: C8.2@82.623,43.742 C8.2 ; v3(86.36,43.742) U1.13
  Top Layer w0.6: L1.2 C8.2
  Top Layer w0.8: v5(81.788,43.742) C8.2@82.623,43.742
  Bottom Layer w0.35: v5(81.788,43.742) v3(86.36,43.742)
NetC17_1: C17.1 C18.1 J1.2 U4.2 | length 20.5
  Top Layer w0.254: C18.1@123.18,61.68 C18.1
  Top Layer w0.5: U4.2 119.116,62.696 C17.1
  Top Layer w0.8: C17.1 C18.1@123.18,61.68 ; C18.1 124.644,62.636 130.638,62.636 J1.2
NetC17_2: C17.2 C19.1 J1.1 U4.3 | length 20.7
  Top Layer w0.254: C17.2 C17.2@120.326,65.303
  Top Layer w0.5: U4.3 118.989,63.966 C17.2
  Top Layer w0.8: C17.2@120.326,65.303 123.247,65.303 C19.1 124.764,64.16 131.352,64.16 J1.1
NetC21_1: C21.1 R23.2 U6.4 | length 11
  Top Layer w0.5: U6.4 53.763,65.024 C21.1 R23.2
NetCJ1_2: CJ1.2 R19.1 U5.2 | length 24.6
  Top Layer w0.2: R19.1 R19.1@123.942,48.98
  Top Layer w0.3: R19.1@123.942,48.98 U5.2 140.504,48.98 140.97,48.514 140.97,44.418 CJ1.2
NetD1_A: D1.A R2.2 | length 10.6
  Top Layer w0.2: D1.A@6.077,28.66 R2.2
NetD1_K: D1.K U1.2 | length 109.2
  Top Layer w0.2: D1.K@3.791,28.442 D1.K 3.791,28.911 4.902,30.023 17.983,30.023 18.364,30.404 18.364,32.258 18.872,32.766 21.387,32.766 21.768,33.147 21.768,34.392 24.079,36.703 34.595,36.703 41.834,43.942 53.619,43.942 54.813,45.136 54.813,51.079 55.626,51.892 60.3,51.892 61.265,50.927 63.475,50.927 63.932,51.384 63.932,54.508 64.719,55.296 75.921,55.296 76.81,54.407 76.81,50.063 77.631,49.242 U1.2
NetD5_A: D5.A R15.2 | length 10.1
  Top Layer w0.2: D5.A@6.534,31.454 R15.2
NetD6_1: D6.1 R24.1 U6.2 | length 11.5
  Top Layer w1: D6.1 34.519,66.599 36.093,65.024 U6.2 ; D6.1@30.886,67.132 R24.1
NetD7_K: D7.K R29.2 | length 14.1
  Top Layer w0.2: D7.K 3.791,35.033 4.649,35.891 6.883,35.891 8.526,34.248 R29.2
NetP2_3: P2.3 R12.3 | length 23
  Top Layer w0.3: R12.3 76.924,10.668 93.146,10.668 P2.3
NetP2_18: P2.18 R12.1 | length 25.2
  Top Layer w0.3: P2.18 58.116,11.48 58.928,10.668 70.612,10.668 75.306,5.974 R12.1
NetP7_1: P7.1 P9.1 | length 3.2
  Top Layer w0.8: P9.1 P7.1
NetP8_2: P8.2 U7.4 | length 17.7
  Bottom Layer w3: P8.2 U7.4
NetP9_2: P9.2 R30.2 | length 4.5
  Top Layer w0.35: P9.2 33.816,43.697 R30.2
NetP9_3: P9.3 U7.1 | length 12.8
  Top Layer w0.8: U7.1 24.147,41.157 P9.3
NetQ1_B: Q1.B R23.1 R25.2 | length 6.8
  Top Layer w0.2: R25.2@58.928,66.77 R25.2 R25.2@59.365,66.313
  Top Layer w0.5: R25.2@58.928,66.77 R23.1 ; R25.2@59.365,66.313 Q1.B
NetQ2_B: Q2.B R27.1 | length 4
  Top Layer w0.35: Q2.B 40.697,46.298 40.961,46.034 R27.1 R27.1@42.529,46.421
NetQ2_C: Q2.C R29.1 R30.1 | length 30.4
  Top Layer w0.35: R29.1 23.425,37.617 33.833,37.617 38.278,42.062 Q2.C@38.278,48.267 ; R30.1 37.306,49.378 Q2.C
NetR22_2: R22.2 R24.2 | length 2.8
  Top Layer w1: R24.2 R22.2
NetR26_1: R26.1 U8.2 | length 4
  Top Layer w0.254: U8.2 61.493,50.013 R26.1
NetR27_2: R27.2 R28.2 U8.4 | length 7.3
  Top Layer w0.35: R27.2 R28.2 ; R28.2@46.565,49.047 R28.2 ; U8.4 47.53,50.013 R28.2
OSCIN: C6.1 U1.5 Y1.2 | length 21.8
  Top Layer w0.2: C6.1 72.58,48.98 Y1.2 75.45,47.742 U1.5
OSCOUT: C7.2 U1.6 Y1.1 | length 22.1
  Top Layer w0.2: C7.2 71.999,46.313 Y1.1 75.722,47.242 U1.6
OUT_GND: Q2.E R28.1 R31.1 | length 5.1
  Top Layer w0.3: R28.1@42.409,48.321 R28.1 ; R31.1 R31.1@42.916,51.674
  Top Layer w0.35: Q2.E R28.1@42.232,49.286
  Top Layer w0.55: R28.1 R31.1
OUTPUT: R26.2 U1.61 | length 35.8
  Top Layer w0.2: R26.2 62.509,55.169 63.221,55.88 90.17,55.88 91.836,54.214 U1.61
PA8: P1.8 U1.41 | length 46.7
  Top Layer w0.2: U1.41 103.249,46.242 105.079,44.412 125.463,44.412 127,42.875 127,41.91 136.322,32.588 138.198,32.588 P1.8
PA9: P1.9 U1.42 | length 45.8
  Top Layer w0.2: U1.42 103.314,46.742 105.244,44.812 125.698,44.812 127.492,43.018 127.492,42.18 134.522,35.15 138.176,35.15 P1.9
PA10: P1.10 U1.43 | length 44.5
  Top Layer w0.2: U1.43 103.38,47.242 105.41,45.212 125.984,45.212 133.731,37.465 138.401,37.465 P1.10
PB0: P1.4 U1.26 | length 60.1
  Top Layer w0.2: U1.26 94.836,37.498 97.028,35.306 110.236,35.306 110.744,34.798 110.744,27.94 111.652,27.032 v1(130.226,27.032)
  Bottom Layer w0.2: v1(130.226,27.032) 130.226,24.359 132.156,22.428 138.198,22.428 P1.4
PB1: P1.5 U1.27 | length 57.9
  Top Layer w0.2: U1.27 95.336,37.818 97.34,35.814 110.49,35.814 111.252,35.052 111.252,28.143 111.76,27.635 v1(130.861,27.635)
  Bottom Layer w0.2: v1(130.861,27.635) 130.861,25.781 131.75,24.892 138.274,24.892 P1.5
PB9: P1.19 U1.62 | length 69.7
  Top Layer w0.25: v1(98.298,55.118) 102.616,55.118 104.648,57.15 110.49,57.15 111.633,56.007 111.633,46.304 112.217,45.72 126.492,45.72 134.112,38.1 v1(138.176,38.1)
  Top Layer w0.254: v1(90.932,54.102) 91.336,53.698 U1.62
  Bottom Layer w0.25: v1(90.932,54.102) 91.948,55.118 v1(98.298,55.118) ; P1.19 138.176,35.026 v1(138.176,38.1)
PB10: P1.6 U1.29 | length 51.2
  Top Layer w0.2: U1.29 96.336,38.538 97.916,36.958 125.348,36.958 130.556,31.75 130.556,30.226 v1(132.334,28.448)
  Bottom Layer w0.2: v1(132.334,28.448) 133.35,27.432 138.274,27.432 P1.6
PB11: P1.7 U1.30 | length 49.7
  Top Layer w0.2: U1.30 96.836,38.858 98.336,37.358 125.71,37.358 131.064,32.004 131.064,30.734 v1(132.334,29.464)
  Bottom Layer w0.2: v1(132.334,29.464) 135.636,29.464 136.144,29.972 138.026,29.972 139.26,28.738 P1.7
PB12: P1.11 U1.33 | length 57.4
  Top Layer w0.2: U1.33 102.723,42.242 104.053,40.912 123.374,40.912 133.274,31.012 133.274,17.192 P1.11
PB13: P1.12 U1.34 | length 55.4
  Top Layer w0.2: U1.34 102.789,42.742 104.119,41.412 123.44,41.412 133.674,31.178 133.674,19.332 P1.12
PB14: P1.13 U1.35 | length 53.4
  Top Layer w0.2: U1.35 102.855,43.242 104.185,41.912 123.506,41.912 134.074,31.344 134.074,21.472 P1.13
PB15: P1.14 U1.36 | length 51.4
  Top Layer w0.2: U1.36 102.92,43.742 104.25,42.412 123.571,42.412 134.474,31.509 134.474,23.612 P1.14
PC3: P1.3 U1.11 | length 78.5
  Top Layer w0.25: U1.11 91.275,44.742 92.1,43.917 94.64,43.917 v1(95.047,43.51)
  Bottom Layer w0.25: v1(95.047,43.51) 95.047,26.594 96.977,24.663 126.543,24.663 136.5,14.707 140.157,14.707 140.741,15.291 140.741,17.345 P1.3
PC6: P1.15 U1.37 | length 49.4
  Top Layer w0.2: U1.37 102.986,44.242 104.416,42.812 123.737,42.812 134.874,31.675 134.874,25.752 P1.15
PC7: P1.16 U1.38 | length 47.4
  Top Layer w0.2: U1.38 103.052,44.742 104.582,43.212 123.903,43.212 135.382,31.733 135.382,27.784 P1.16
PC8: P1.17 U1.39 | length 45.4
  Top Layer w0.2: U1.39 103.117,45.242 104.747,43.612 124.068,43.612 135.782,31.898 135.782,29.924 P1.17
PC9: CJ1.1 K5.2 P1.18 R35.1 U1.40 | length 126.9
  Top Layer w0.2: K5.2@88.787,8.525 90.453,6.858 95.504,6.858 99.314,10.668 106.451,10.668 107.938,12.155 107.938,30.06 107.518,30.48 99.881,30.48 R35.1 ; v1(97.699,45.742) U1.40 103.183,45.742 104.913,44.012 124.898,44.012 v1(126.238,42.672) 126.238,42.008 P1.18
  Top Layer w0.65: R35.1 v1(97.699,33.782)
  Top Layer w0.8: K5.2@82.309,8.525 K5.2@88.787,8.525
  Bottom Layer w0.2: v1(97.699,33.782) v1(97.699,45.742) ; v1(126.238,42.672) 136.6,42.672 CJ1.1
PC14: P1.1 U1.3 | length 79.6
  Top Layer w0.25: U1.3 91.974,48.742 92.456,48.26 92.456,46.711 94.056,45.11 96.114,45.11 v1(96.85,44.374) ; v1(138.176,19.888) 138.176,14.83 P1.1
  Bottom Layer w0.25: v1(96.85,44.374) 96.85,26.924 97.815,25.959 127.559,25.959 133.629,19.888 v1(138.176,19.888)
PC15: P1.2 U1.4 | length 75.2
  Top Layer w0.25: U1.4 91.636,48.242 91.897,47.981 91.897,46.482 93.878,44.501 95.428,44.501 v1(95.834,44.094)
  Bottom Layer w0.25: v1(95.834,44.094) 95.834,26.873 97.384,25.324 127.152,25.324 135.179,17.297 138.249,17.297 P1.2
RESET: C5.1 JTAG1.15 K1.1 R1.2 U1.7 | length 190.2
  Top Layer w0.2: v1(48.006,10.236) 49.225,9.017 55.016,9.017 55.651,8.382 55.651,5.512 56.363,4.801 58.139,4.801 JTAG1.15 ; v3(83.909,46.139) 84.512,46.742 U1.7 90.418,46.742 92.177,44.983 v1(92.177,44.958)
  Top Layer w0.3: JTAG1.15 60.687,4.775 68.377,4.775 69.342,3.81 80.01,3.81 81.534,5.334 120.439,5.334 K1.1@123.629,8.525
  Top Layer w0.5: C5.1 R1.2
  Top Layer w0.7: R1.2 v1(83.464,57.912)
  Top Layer w0.8: K1.1@123.629,8.525 K1.1@130.107,8.525
  Bottom Layer w0.2: v1(48.006,10.236) 48.031,10.262 48.031,21.285 52.597,25.851 91.281,25.851 92.177,26.746 v1(92.177,44.958)
  Bottom Layer w0.254: v1(83.464,57.912) 83.909,57.468 v3(83.909,46.139)
TCK: JTAG1.9 R9.2 U1.49 | length 103.2
  Top Layer w0.2: v1(49.301,7.696) 50.19,7.696 50.597,7.29 50.597,4.723 JTAG1.9 ; v1(95.301,45.898) 95.853,46.45 95.853,49.016 96.241,49.403 97.46,49.403 97.836,49.779 U1.49 97.836,52.566 98.864,53.594 105.104,53.594 R9.2
  Bottom Layer w0.2: v1(49.301,7.696) 50.165,8.56 50.165,20.835 53.581,24.251 92.163,24.251 94.047,26.134 94.047,44.644 v1(95.301,45.898)
TDI: JTAG1.5 R6.1 U1.50 | length 103.4
  Top Layer w0.2: v1(95.148,46.761) 95.428,47.041 95.428,49.276 95.987,49.835 97.155,49.835 97.336,50.016 U1.50 97.336,52.632 98.806,54.102 104.924,54.102 R6.1
  Bottom Layer w0.2: JTAG1.5 48.057,4.845 48.057,7.366 49.708,9.017 49.708,21.031 53.327,24.651 91.998,24.651 93.647,26.3 93.647,45.26 v1(95.148,46.761)
TDO: JTAG1.13 R8.1 U1.55 | length 104.6
  Top Layer w0.2: v1(48.184,8.458) 52.502,8.458 53.162,7.798 53.162,5.156 53.518,4.801 55.599,4.801 JTAG1.13 ; v1(94.336,47.219) 94.836,47.719 U1.55 R8.1@94.836,58.274
  Top Layer w0.254: R8.1 R8.1@94.836,58.274
  Bottom Layer w0.2: v1(48.184,8.458) 49.266,9.541 49.266,21.155 53.162,25.051 91.832,25.051 93.247,26.465 93.247,46.13 v1(94.336,47.219)
TMS: JTAG1.7 R7.1 U1.46 | length 98.1
  Top Layer w0.2: v1(96.253,45.834) 96.253,48.679 96.52,48.946 97.663,48.946 97.867,48.742 U1.46 101.296,48.742 102.083,47.955 103.886,47.955 104.893,46.948 R7.1
  Bottom Layer w0.2: JTAG1.7 50.597,4.845 50.597,20.701 53.696,23.8 92.278,23.8 94.447,25.968 94.447,44.028 v1(96.253,45.834)
TRST: JTAG1.3 R5.2 U1.56 | length 92.8
  Top Layer w0.25: v1(93.421,47.269) 94.336,48.184 U1.56
  Top Layer w0.35: v1(48.666,18.034) R5.2
  Bottom Layer w0.2: JTAG1.3 45.517,4.845 45.517,6.756 48.666,9.906 v1(48.666,18.034) 48.666,21.121 52.996,25.451 91.666,25.451 92.822,26.606 92.822,46.67 v1(93.421,47.269)
ZORE: Q1.C R21.1 U1.57 | length 42.6
  Top Layer w0.2: R21.1@68.123,66.345 70.891,66.345 71.374,65.862 71.374,57.912 72.644,56.642 v1(88.9,56.642) ; v1(92.964,56.642) 93.836,55.77 U1.57
  Top Layer w0.5: Q1.C 66.028,66.345 R21.1@68.123,66.345
  Bottom Layer w0.2: v1(88.9,56.642) v1(92.964,56.642)
pads on no net: JTAG1.11 JTAG1.17 JTAG1.19 P2.0 P2.16 U4.8

## Polygon pours and split planes (outlines as drawn)
GND_6675 on Top Layer "Top Layer-No Net" (solid, remove dead copper, pour order 8): 107.95,81.382 107.95,58.132 111.557,58.132 117.958,58.132 117.958,52.645 117.958,52.341 131.699,52.341 143.408,52.341 143.408,57.573 143.408,73.143 132.385,73.143 124.536,73.143 124.536,81.382
GND on Top Layer "Top Layer-No Net" (solid, remove dead copper, pour order 14): 0,0 143.5,0 143.5,54.966 141.097,54.966 118.085,54.966 118.085,59.588 118.085,59.842 114.224,59.842 107.696,59.842 107.696,81.255 107.696,81.28 45.898,81.28 45.898,60.046 45.898,57.734 53.746,57.734 54.204,57.734 54.204,45.644 54.204,41.732 46.787,41.732 41.123,41.732 41.123,36.855 41.123,36.576 0.025,36.576
GND on Top Layer "Top Layer-No Net" (solid, remove dead copper, pour order 16): 45.898,81.28 45.898,56.236 43.942,54.28 43.815,54.153 28.931,54.153 20.142,54.153 18.745,52.756 17.475,51.486 17.475,45.034 17.475,38.456 14.605,35.585 15.164,35.027 40.767,35.027 48.997,35.027 56.007,42.037 56.083,42.113 56.083,57.582
GND_6675 on Bottom Layer "Top Layer-No Net" (solid, remove dead copper, pour order 12): 107.925,81.382 107.925,58.132 111.531,58.132 117.932,58.132 117.932,52.645 117.932,52.341 131.674,52.341 143.383,52.341 143.383,57.573 143.383,73.143 132.359,73.143 124.511,73.143 124.511,81.382
GND on Bottom Layer "Top Layer-No Net" (solid, remove dead copper, pour order 18): 0,0 143.5,0 143.5,54.966 141.097,54.966 118.085,54.966 118.085,59.588 118.085,59.842 114.224,59.842 107.696,59.842 107.696,81.255 107.696,81.28 45.898,81.28 45.898,60.046 45.898,57.734 53.746,57.734 54.204,57.734 54.204,45.644 54.204,41.732 46.787,41.732 41.123,41.732 41.123,36.855 41.123,36.576 0.025,36.576
GND on Bottom Layer "Top Layer-No Net" (solid, remove dead copper, pour order 20): 45.898,81.28 45.898,56.236 43.942,54.28 43.815,54.153 28.931,54.153 20.142,54.153 18.745,52.756 17.475,51.486 17.475,45.034 17.475,38.456 14.605,35.585 15.164,35.027 40.767,35.027 48.997,35.027 56.007,42.037 56.083,42.113 56.083,57.582

## Keep-outs
Keep-Out Layer:
  lines w0.254: 0,0 143.5,0 143.5,82 0,82 0,0 ; 6.756,39.827 11.811,39.827 11.811,40.869 6.756,40.869 6.756,39.827 ; 14.554,41.986 14.554,52.222 19.05,56.718 23.774,56.718 23.774,55.372 19.914,55.372 16.205,51.664 16.205,41.986 14.554,41.986 ; 27.534,55.626 27.534,56.921 37.795,56.921 37.795,55.626 27.534,55.626 ; 33.858,72.517 35.154,72.517 35.154,79.985 33.858,79.985 33.858,72.517

## Other copper
Top Layer:
  rectangle net GND_6675: 121.082,55.931 122.53,59.36
  rectangle net GND: 111.277,56.981 117.693,59.233
  rectangle net GND: 107.061,57.836 111.304,59.233
  rectangle net GND: 7.341,19.964 11.887,24.308
  region net GND: 51.029,36.22 51.029,31.445 51.181,31.293 53.518,31.293 53.518,35.89 52.832,36.576 52.781,36.525 51.232,36.525
  region net +9V: 8.372,11.642 9.388,10.626 17.516,10.626 17.77,10.88 17.77,15.509 18.44,16.18 28.067,16.18 28.438,16.551 28.438,18.754 27.93,19.262 9.896,19.262 8.372,17.738
  region net +5V: 17.77,22.056 27.93,22.056 28.438,22.564 28.438,29.93 27.93,30.438 25.136,30.438 24.882,30.184 24.882,26.12 24.374,25.612 18.278,25.612 17.516,24.85 17.516,22.31
  region net GND: 108.673,48.726 108.673,53.772 109.017,53.772 109.017,48.489 108.814,48.489
  region net +5V: 18.278,25.612 16.866,25.612 16.866,25.552 17.526,24.892 18.059,24.892 18.517,25.349
  region net GND: 18.217,21.791 20.119,21.791 20.803,21.107 20.803,19.66 19.856,19.66 19.724,19.527 17.684,19.527 17.12,20.091 17.17,20.142 17.17,21.539 17.094,21.615
  region net GND: 52.672,12.61 53.4,12.61 53.568,12.778 53.568,12.817 53.92,12.817 54.178,13.076 54.178,13.767 51.562,13.767 51.206,13.411 51.841,12.776 52.07,12.776
  region net GND: 49.759,6.909 50.216,6.807 50.154,6.745 50.154,5.297 49.657,4.801 49.327,4.801 49.327,5.917 49.122,6.121 47.955,6.121 47.854,6.223 47.981,6.35 47.981,7.214 49.022,7.214 49.122,7.087
  region net GND: 50.216,6.807 50.23,6.793 50.23,5.37 50.226,5.37 49.905,5.049 49.759,5.196 49.759,6.909
  region net GND: 110.109,53.873 110.109,48.362 110.211,48.26 110.261,48.311 110.82,48.311 110.82,53.899 110.769,53.95
  region net GND_6675: 118.999,59.385 118.999,56.896 119.863,56.032 121.641,56.032 121.641,58.953 120.777,59.817 120.701,59.741 120.167,59.741
  region net GND: 46.253,50.902 47.574,50.902 48.844,52.172 54.432,52.172 55.423,53.162 55.423,58.115 51.689,58.115 50.648,59.157 49.911,58.42 46.33,58.42
Bottom Layer:
  rectangle net GND: 16.586,19.279 20.574,21.819
  region net GND: 18.401,19.197 18.484,19.279 19.088,19.279 19.171,19.197 19.411,19.437 18.154,19.437 18.034,19.317 18.034,19.279

## Silkscreen, mask and mechanical layers (free items; w line width, h text height)
Top Overlay:
  circle w0.5: c38.938,69.444 r0.23
  text "温 控 电 路 板  V1.0" at 65.811,77.394 h3.05
  text "2016/07" at 65.557,74.346 h3.05
  text "Output loader" at 1.651,73.457 h1.2
  text "220v_in" at 1.219,37.77 h1.2
  text "BO1" at 133.35,36.068 h0.64
  text "PA10" at 141.224,36.068 h0.64
  text "PB9" at 133.35,33.528 h0.64
  text "PA9" at 141.224,33.528 h0.64
  text "PA8" at 141.224,31.242 h0.64
  text "PC9" at 133.35,30.988 h0.64
  text "PC8" at 133.35,28.448 h0.64
  text "PB11" at 141.224,28.448 h0.64
  text "PC7" at 133.35,25.908 h0.64
  text "PB10" at 141.224,25.908 h0.64
  text "PB1" at 141.224,23.622 h0.64
  text "PC6" at 133.35,23.368 h0.64
  text "PB15" at 133.096,21.082 h0.64
  text "PB0" at 141.224,20.828 h0.64
  text "PB14" at 133.096,18.542 h0.64
  text "PC3" at 141.224,18.288 h0.64
  text "PB13" at 133.096,15.748 h0.64
  text "PC15" at 141.224,15.748 h0.64
  text "PB12" at 133.096,13.208 h0.64
  text "PC14" at 141.224,13.208 h0.64
Bottom Overlay:
  text "K_SENSOR" at 141.148,66.675 h1 r90
  text "OUTPUT LOADER" at 2.108,57.76 h1.2 r270
  text "220V_IN" at 3.505,44.704 h1.2 r270
  text "7.5/12V_IN" at 2.53,14.944 h1.2 r270

## Text inside footprints (layer, text, board x,y; h text height)
C12: Top Overlay "+" at 29.439,18.694 h1 r180
C13: Top Overlay "+" at 29.642,29.972 h1 r180
C14: Top Overlay "+" at 73.444,30.848 h1
P1: Top Overlay "20" at 135.717,38.162 h1.27; Top Overlay "1" at 139.781,10.476 h1.27; Top Overlay "1" at 136.987,10.476 h1.27; Top Overlay "1" at 136.225,10.476 h1.27; Top Overlay "10" at 138.765,38.162 h1.27
P4: Top Overlay "1" at 21.209,2.972 h1.27; Top Overlay "GND" at 21.971,0.432 h1.27; Top Overlay "3.3V" at 30.058,7.789 h1
P5: Top Overlay "1" at 21.199,5.724 h1.27; Top Overlay "5V" at 11.125,7.747 h1; Top Overlay "GND" at 7.991,0.39 h1.27
U3: Top Overlay "3" at 47.904,29.44 h1.27 r180; Top Overlay "1" at 52.476,29.44 h1.27 r180
U7: Top Overlay "~" at 17.17,63.5 h3; Top Overlay "~" at 17.297,73.533 h3; Top Overlay "-" at 17.297,43.815 h3; Top Overlay "+" at 17.043,50.8 h3